# EAGLE board simpleDTMF2 (EAGLE 4.16)
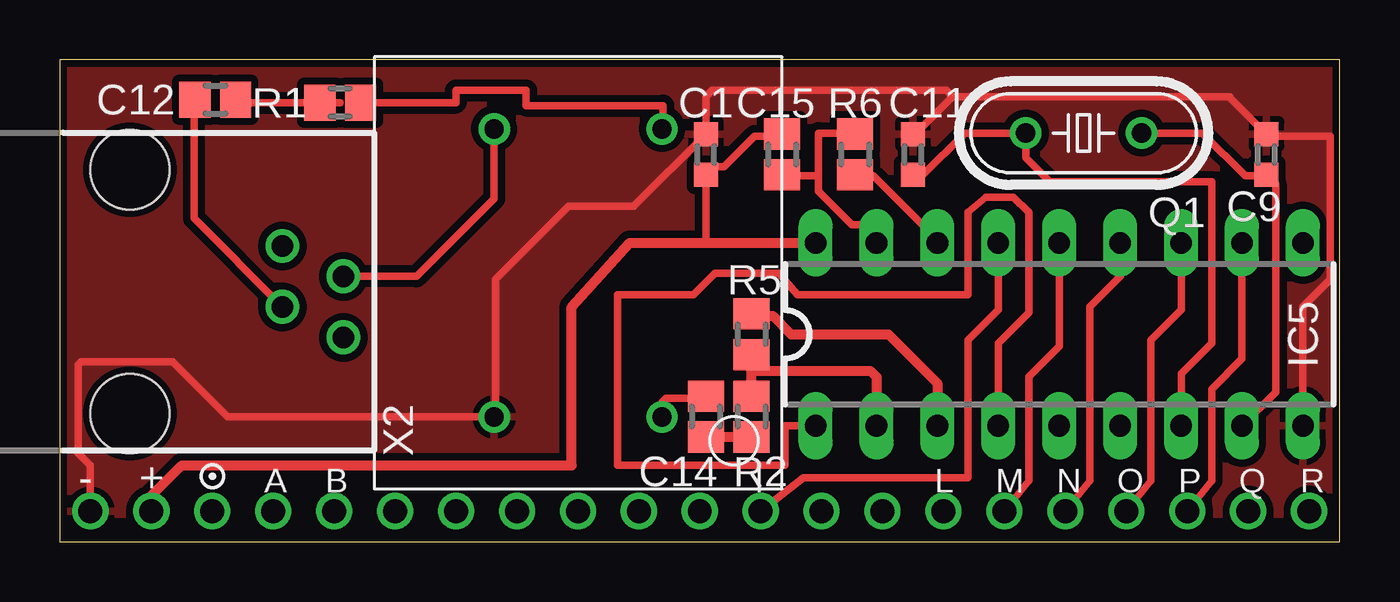
[diagram p0: board, top side]
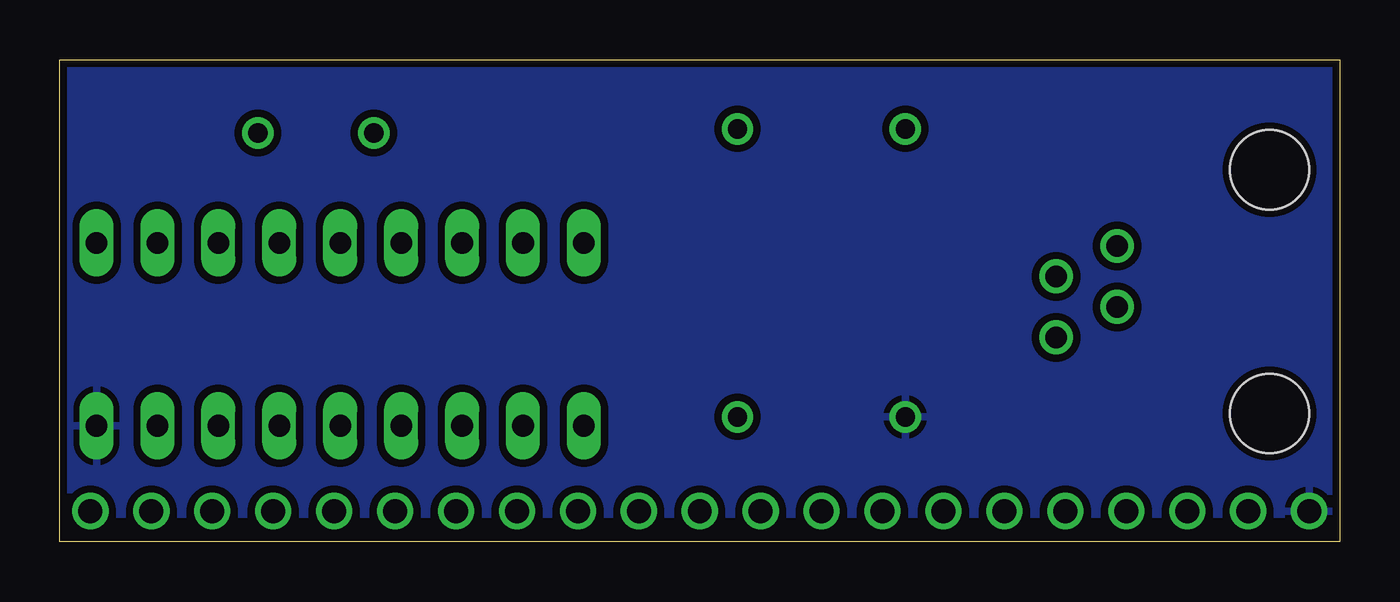
[diagram p1: board, bottom side, seen from below]

Size 53.34 x 20.07 mm. Coordinates in mm from the lower left corner, seen from the top.
Outline: 0,0 53.34,0 53.34,20.07 0,20.07 0,0
Copper layers (1*16): Top 0.035mm / dielectric 1.5mm / Bottom 0.035mm
Design rules "default": minimum track width 10mil, minimum drill 0.6mm, track to track 10mil, track to pad 10mil, pad to pad 10mil, via to via 10mil, smd to smd 8mil, copper to edge 10mil, drill to drill 8mil, minimum pad ring 10mil, minimum via ring 10mil, stop-mask expansion 4mil, vias tented up to drill 0mil, thermal gap 10mil

## Footprints (pad centres in the part's own frame; a part is rotated, then mirrored left to right if it is on the bottom)
C0603 = smd 1 x 1: 1 -0.85,0; 2 0.85,0
C0805 = smd 1.3 x 1.5: 1 -0.85,0; 2 0.85,0
DIL18 = drill 0.9 long: 1 -10.16,-3.81; 2 -7.62,-3.81; 3 -5.08,-3.81; 4 -2.54,-3.81; 5 0,-3.81; 6 2.54,-3.81; 7 5.08,-3.81; 8 7.62,-3.81; 9 10.16,-3.81; 10 10.16,3.81; 11 7.62,3.81; 12 5.08,3.81; 13 2.54,3.81; 14 0,3.81; 15 -2.54,3.81; 16 -5.08,3.81; 17 -7.62,3.81; 18 -10.16,3.81
HC49/S = drill 0.813 round: 1 -2.413,0; 2 2.413,0
R0805 = smd 1.3 x 1.5: 1 -0.85,0; 2 0.85,0
C9000 = drill 0.8 round: P$1 5,3; P$2 12,3; P$3 5,15; P$4 12,15
FCI6/4 = drill 0.9 round: 1 -8.636,-2.794; 2 -7.366,-0.254; 3 -6.096,-2.794; 4 -4.826,-0.254 | hole 3.3: -11.811,-9.144; -1.651,-9.144
CORE_IOHEAD_NOSILC = drill 1 round: 1 25.4,0; 2 22.86,0; 3 20.32,0; 4 17.78,0; 5 15.24,0; 6 12.7,0; 7 10.16,0; 8 7.62,0; 9 5.08,0; 10 2.54,0; 11 0,0; 12 -2.54,0; 13 -5.08,0; 14 -7.62,0; 15 -10.16,0; 16 -12.7,0; 17 -15.24,0; 18 -17.78,0; 19 -20.32,0; 20 -22.86,0; 21 -25.4,0

## Placement (x,y rotation side)
C1  100n  [C0603]  26.92,16.13 90 top
C9  [C0603]  50.29,16.13 90 top
C11  [C0603]  35.56,16.13 90 top
C12  100n  [C0805]  6.48,18.41 0 top
C14  100n  [C0805]  26.92,5.21 270 top
C15  100n  [C0805]  30.1,16.13 270 top
IC5  MT8870DIL  [DIL18]  41.66,8.64 0 top
Q1  3.579545M  [HC49/S]  42.67,17.02 180 top
R1  2k7  [R0805]  11.68,18.29 180 top
R2  100k  [R0805]  28.83,5.21 270 top
R5  100k  [R0805]  28.83,8.64 270 top
R6  300k  [R0805]  33.15,16.13 270 top
TR1  CRITCHLEY9000  [C9000]  30.1,20.19 180 top
X2  FCI6/4  [FCI6/4]  12.06,3.68 270 top
X3  CORE_IOHEADEXP  [CORE_IOHEAD_NOSILC]  26.67,1.27 0 bottom

## Library data of the parts
C1 C9 C11 C12 C14 C15 R1 R2 R5 R6 = rcl
IC5 = mitel-mt8870
Q1 = crystal
TR1 = Critchley9000
X2 = fci-modular
X3 = expboard

## Nets
EXP_A: X3.4
EXP_B: X3.5
EXP_C: X3.6
EXP_D: X3.7
EXP_E: X3.8
EXP_F: X3.9
EXP_G: X3.10
EXP_H: X3.11
EXP_J: X3.13
EXP_K: X3.14
EXP_L: X3.15
EXP_Q: X3.20
EXP_R: X3.21
GND: C1.2 C9.2 C11.2 IC5.9 TR1.P$4 X3.1
N$3: C11.1 IC5.7 Q1.2
N$4: C9.1 IC5.8 Q1.1
N$5: IC5.16 R6.2
N$6: C15.2 IC5.17 R6.1
N$9: R1.1 TR1.P$1
N$10: C12.2 R1.2
N$11: C12.1 X2.3
N$14: TR1.P$2 X2.2
N$15: C14.1 TR1.P$3
N$16: C14.2 R2.2
N$17: IC5.2 R2.1 R5.2
N$18: IC5.3 R5.1
N$19: IC5.1 IC5.4
Q1: IC5.11 X3.19
Q2: IC5.12 X3.18
Q3: IC5.13 X3.17
Q4: IC5.14 X3.16
STD: IC5.15 X3.12
V_CAN: X3.3
VCC: C1.1 C15.1 IC5.18 X3.2

## Tracks (layer width: path | path; a pad name or v marks a point on that pad's centre or on a via)
GND
  Top 0.305: X3.1 1.27,3.17 0.76,3.68 0.76,7.37 0.89,7.49 4.7,7.49 6.99,5.21 18.16,5.21 | 18.16,5.21 18.15,5.19 TR1.P$4 18.11,5.21 18.16,5.21 | 18.16,5.21 18.16,10.92 21.21,13.97 23.91,13.97 C1.2 26.92,18.54 27.18,18.8 36.96,18.8 37.21,18.54 | IC5.9 51.82,9.78 52.96,10.92 52.96,16.89 50.29,16.89 C9.2 48.77,18.5 48.77,18.54 37.21,18.54 | C11.2 35.56,16.89 37.21,18.54
  pour Bottom (isolate 0.305, rank 3): 0,20.07 53.34,20.07 53.34,1.14 0,1.14
  pour Top (isolate 0.305, rank 3): 0,20.07 53.34,20.07 53.34,1.14 0,1.14
N$3
  Top 0.305: C11.1 35.65,15.28 35.69,15.24 35.94,15.24 37.72,17.02 Q1.2 40.26,16 41.27,14.99 48.01,14.99 48.01,8.26 46.74,6.99 IC5.7
N$4
  Top 0.305: Q1.1 47.62,17.02 49.4,15.24 50.29,15.24 C9.1 50.67,14.9 50.67,6.22 IC5.8
N$5
  Top 0.305: R6.2 33.19,15.24 33.91,15.24 36.58,12.57 IC5.16
N$6
  Top 0.305: 30.1,15.11 30.1,15.24 | R6.1 33.15,17.02 31.62,17.02 31.62,15.24 | 30.1,15.24 C15.2 | 30.1,15.24 31.62,15.24 | IC5.17 34.04,13.21 33.02,13.21 31.62,14.61 31.62,15.24
N$9
  Top 0.305: R1.1 16.51,18.29 16.51,18.8 19.43,18.8 19.43,18.16 25.15,18.16 25.15,17.19 TR1.P$1
N$10
  Top 0.305: 11.6,18.29 11.68,18.29 | 11.6,18.29 R1.2 | C12.2 7.45,18.29 11.6,18.29
N$11
  Top 0.305: C12.1 5.59,18.41 5.59,13.46 X2.3
N$14
  Top 0.305: TR1.P$2 18.1,14.29 14.86,11.05 X2.2
N$15
  Top 0.305: TR1.P$3 25.1,5.79 25.27,5.97 26.92,5.97 C14.1
N$16
  Top 0.406: C14.2 26.92,4.32 26.96,4.36 R2.2
N$17
  Top 0.406: 28.83,5.97 R2.1 28.83,7.11 | 28.83,7.11 R5.2 | IC5.2 34.04,6.86 33.78,7.11 28.83,7.11
N$18
  Top 0.406: IC5.3 36.58,6.6 34.54,8.64 30.48,8.64 29.72,9.4 28.96,9.4 28.87,9.49 R5.1
N$19
  Top 0.305: IC5.1 30.23,4.83 30.23,3.17 23.24,3.17 23.24,10.29 26.42,10.29 27.3,11.18 29.97,11.18 30.73,10.29 37.85,10.29 37.85,13.72 38.61,14.35 39.75,14.35 40.39,13.72 40.39,9.53 39.12,8.26 IC5.4
Q1
  Top 0.305: IC5.11 49.28,7.62 48.01,6.35 48.01,2.54 X3.19
Q2
  Top 0.305: IC5.12 46.74,9.65 45.47,8.38 45.47,2.54 X3.18
Q3
  Top 0.305: IC5.13 44.2,11.05 42.93,9.78 42.93,2.54 X3.17
Q4
  Top 0.305: IC5.14 41.66,8.13 40.39,6.86 40.39,2.54 X3.16
STD
  Top 0.305: X3.12 30.99,2.67 37.85,2.67 37.85,8.38 39.12,9.65 IC5.15
VCC
  Top 0.305: 26.92,12.45 C1.1 27.27,15.62 27.69,15.62 28.96,16.89 30.1,16.89 C15.1
  Top 0.406: X3.2 3.81,1.91 5.08,3.17 21.34,3.17 21.34,9.78 23.75,12.45 26.92,12.45 IC5.18

## Text on the board
tPlace: - | + | A | B | I | L | M | N | O | P | Q | R
Document: Top is component side | Expansion will be mounted bottom to bottom with CoreCard